# EAGLE board Small_G2iM+_kit (EAGLE 5.06)
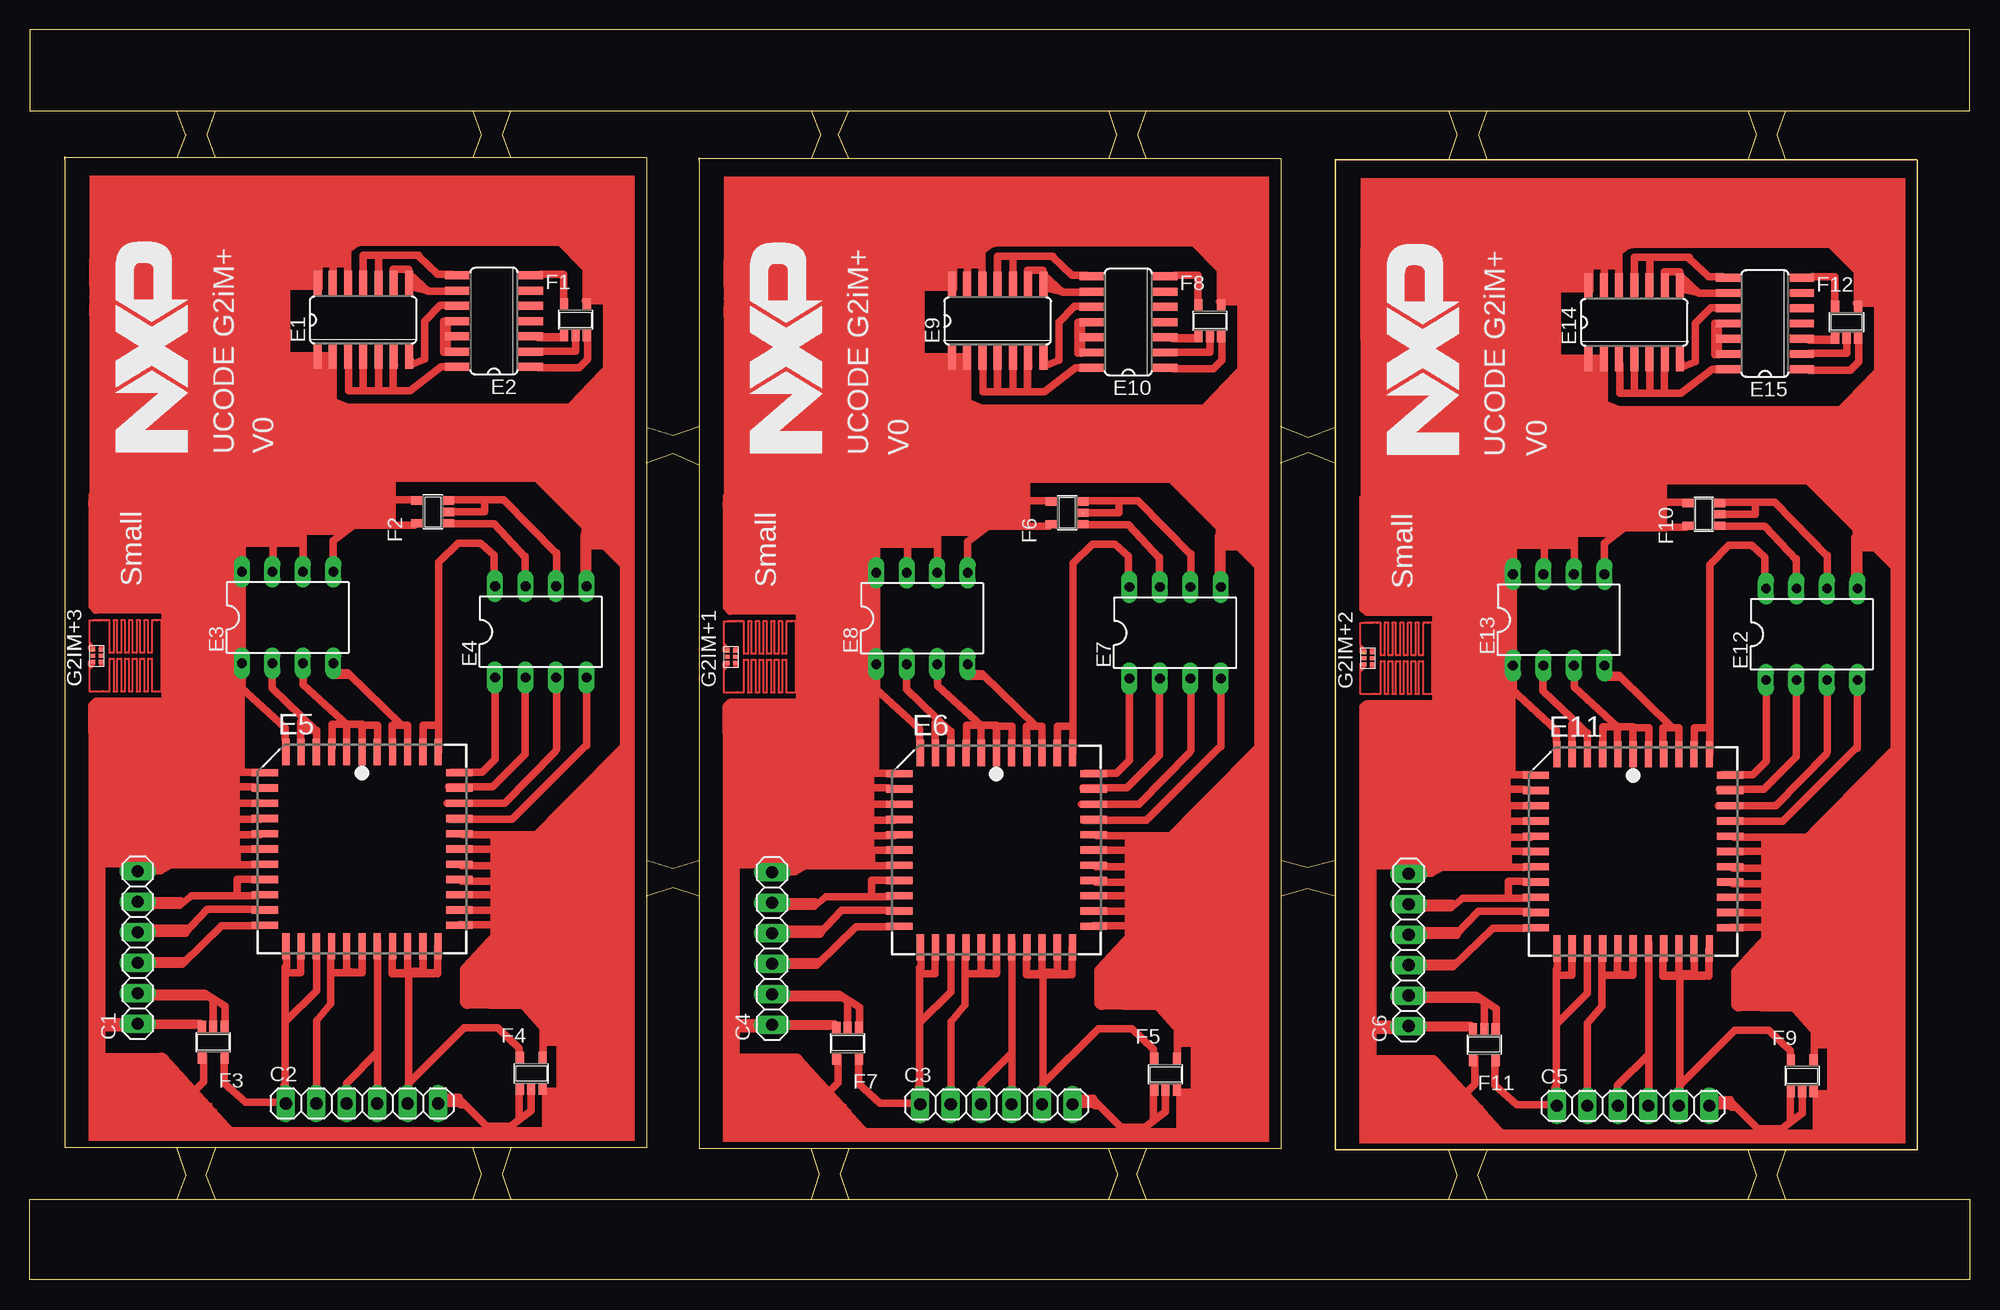
[diagram p0: board, top side]
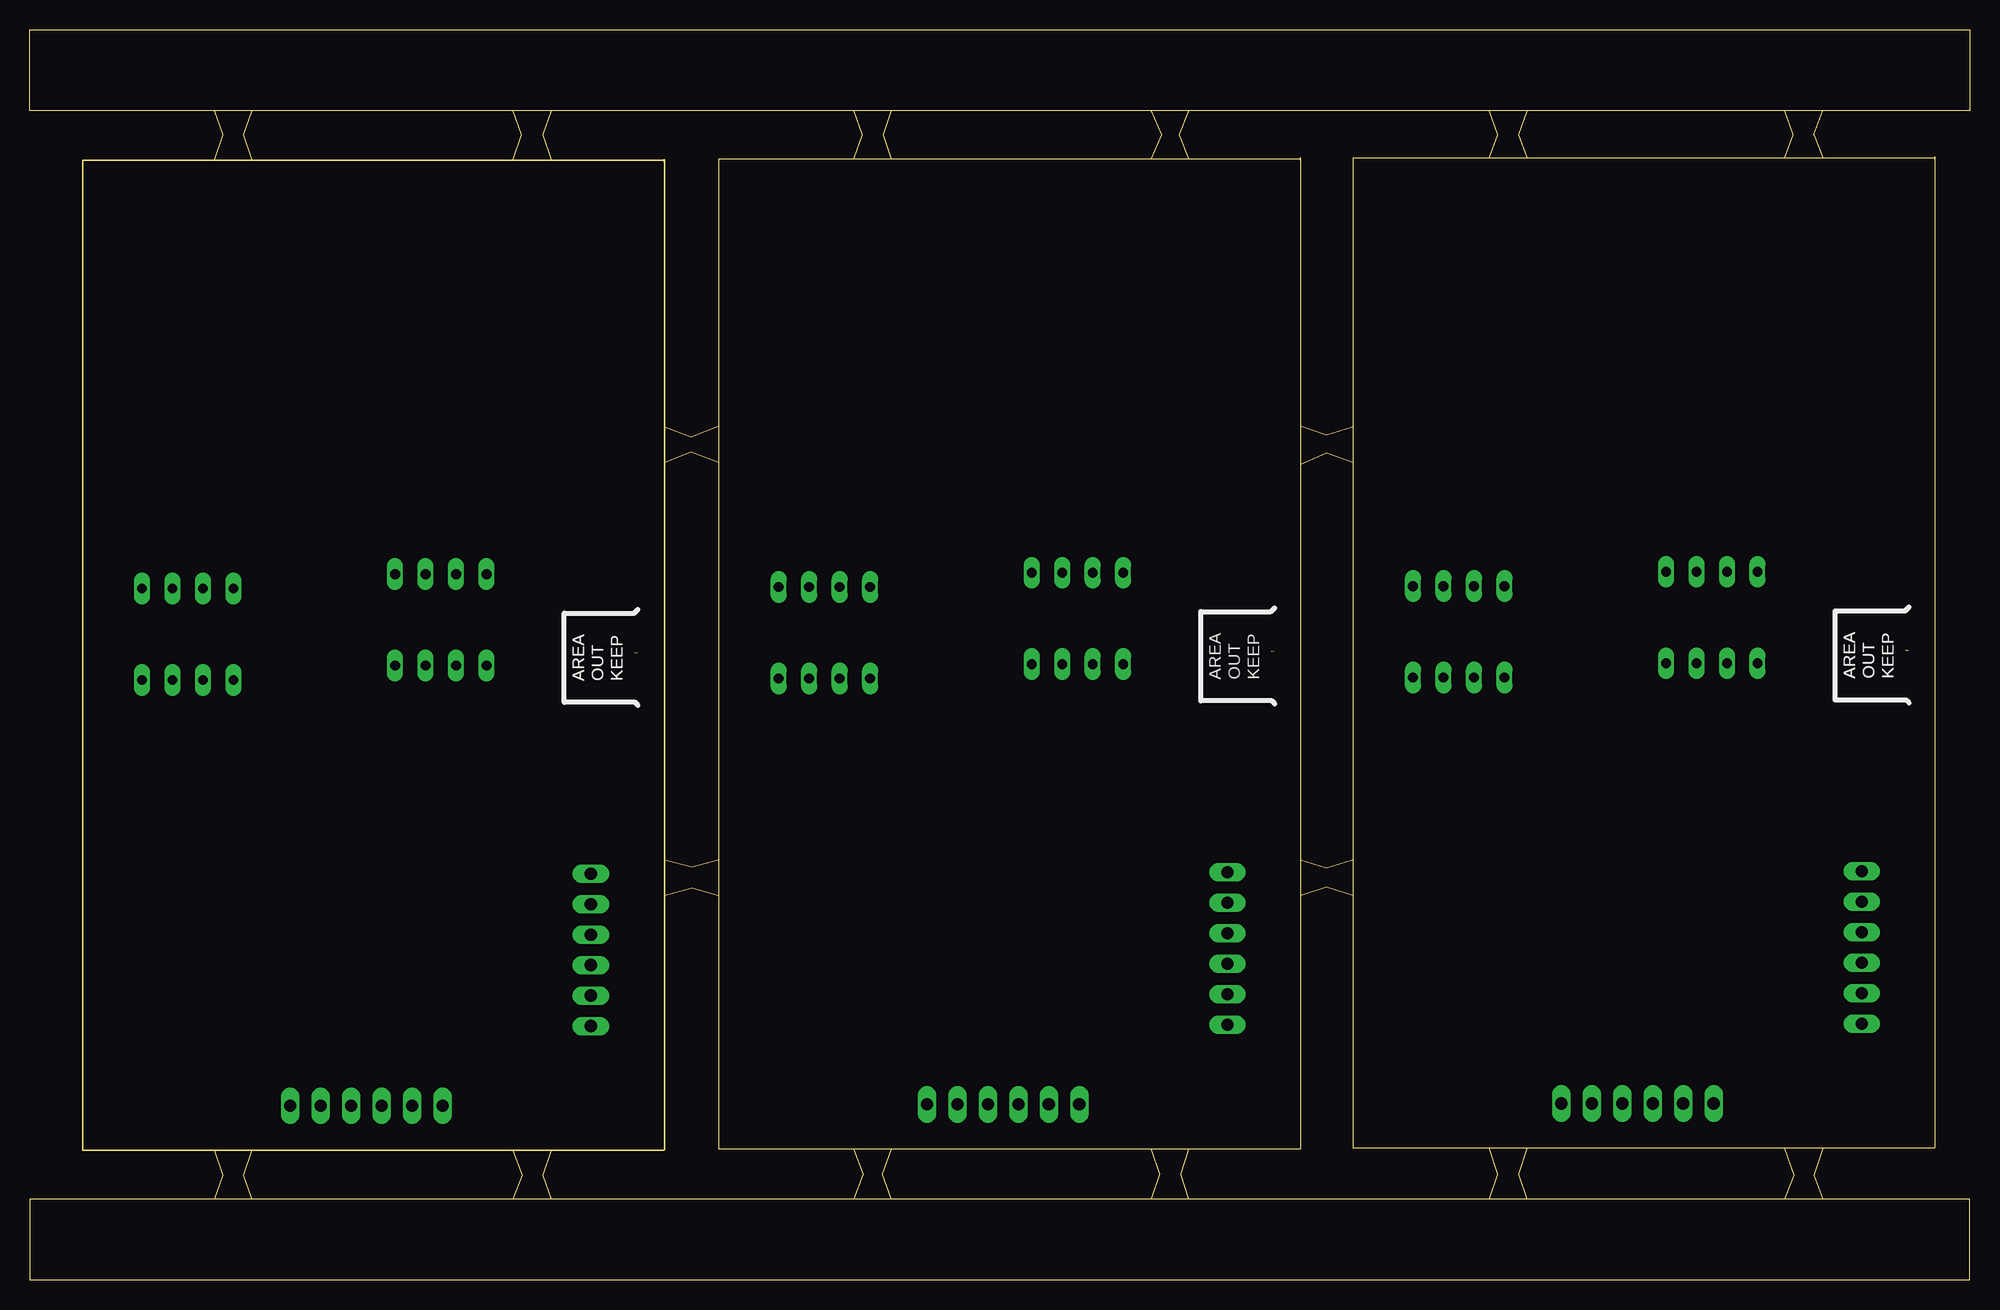
[diagram p1: board, bottom side, seen from below]

Size 161.68 x 104.16 mm. Coordinates in mm from the lower left corner, seen from the top.
Outline: 55.76,93.42 55.76,71.12
Outline: 55.76,71.12 55.76,67.92
Outline: 55.76,67.92 55.76,34.96
Outline: 55.76,34.96 55.76,32
Outline: 55.76,32 55.76,10.92
Outline: 108.8,71.04 108.8,93.34 157.3,93.34 157.3,10.84 108.8,10.84 108.8,32
Outline: 108.8,71.04 108.8,68.08
Outline: 108.8,68.08 108.8,34.96
Outline: 108.8,34.96 108.8,32
Outline: 12.24,97.44 0,97.44 0,104.16 161.68,104.16 161.68,97.44 146.32,97.44
Outline: 12.24,97.44 15.44,97.44
Outline: 15.44,97.44 36.88,97.44
Outline: 36.88,97.44 40.08,97.44
Outline: 40.08,97.44 65.12,97.44
Outline: 65.12,97.44 68.24,97.44
Outline: 68.24,97.44 89.92,97.44
Outline: 89.92,97.44 93.04,97.44
Outline: 93.04,97.44 118.24,97.44
Outline: 118.24,97.44 121.44,97.44
Outline: 121.44,97.44 143.2,97.44
Outline: 143.2,97.44 146.32,97.44
Outline: 12.24,6.72 0,6.72 0,0 161.68,0 161.68,6.72 146.32,6.72
Outline: 12.24,6.72 15.44,6.72
Outline: 15.44,6.72 36.88,6.72
Outline: 36.88,6.72 40.08,6.72
Outline: 40.08,6.72 65.12,6.72
Outline: 65.12,6.72 68.24,6.72
Outline: 68.24,6.72 89.92,6.72
Outline: 89.92,6.72 93.04,6.72
Outline: 93.04,6.72 118.24,6.72
Outline: 118.24,6.72 121.44,6.72
Outline: 121.44,6.72 143.2,6.72
Outline: 143.2,6.72 146.32,6.72
Outline: 12.24,93.52 12.96,95.44 12.24,97.44
Outline: 15.44,97.44 14.72,95.44 15.44,93.52
Outline: 40.08,97.44 39.36,95.44 40.08,93.52
Outline: 36.88,97.44 37.6,95.44 36.88,93.52
Outline: 51.44,71.04 53.6,70.4 55.76,71.12
Outline: 104.24,71.12 106.56,70.24 108.8,71.04
Outline: 51.36,68.08 53.6,68.88 55.76,67.92
Outline: 104.24,68.08 106.56,68.96 108.8,68.08
Outline: 51.44,34.96 53.6,34.32 55.76,34.96
Outline: 104.32,34.96 106.48,34.4 108.8,34.96
Outline: 51.36,32 53.6,32.72 55.76,32
Outline: 104.32,32 106.48,32.64 108.8,32
Outline: 12.24,10.96 12.96,8.72 12.24,6.72
Outline: 15.44,10.96 14.64,8.72 15.44,6.72
Outline: 36.88,10.96 37.6,8.8 36.88,6.72
Outline: 40.08,10.96 39.36,8.8 40.08,6.72
Outline: 65.12,97.44 65.92,95.44 65.12,93.44
Outline: 65.12,10.88 65.76,8.8 65.12,6.72
Outline: 68.24,97.44 67.36,95.44 68.24,93.44
Outline: 68.24,10.88 67.52,8.8 68.24,6.72
Outline: 93.04,97.44 92.32,95.44 93.04,93.44
Outline: 89.92,97.44 90.56,95.44 89.92,93.44
Outline: 89.92,10.88 90.64,8.8 89.92,6.72
Outline: 93.04,10.88 92.24,8.8 93.04,6.72
Outline: 118.24,97.44 118.96,95.44 118.24,93.36
Outline: 121.44,97.44 120.72,95.44 121.44,93.36
Outline: 118.24,10.8 118.96,8.72 118.24,6.72
Outline: 121.44,10.8 120.64,8.72 121.44,6.72
Outline: 146.32,97.44 145.6,95.44 146.32,93.36
Outline: 143.2,97.44 143.92,95.44 143.2,93.36
Outline: 143.2,10.8 143.92,8.72 143.2,6.72
Outline: 146.32,10.8 145.6,8.72 146.32,6.72
Outline: 55.76,10.92 104.26,10.92 104.26,93.42 55.76,93.42
Outline: 55.76,93.42 55.76,10.92
Outline: 51.38,11 2.88,11 2.88,93.5 51.38,93.5 51.38,11
Outline: 157.33,10.8 108.83,10.8 108.83,93.3 157.33,93.3 157.33,10.8
Copper layers (1*16): Top 0.035mm / dielectric 1.5mm / Bottom 0.035mm
Design rules "default *": minimum track width 10mil, minimum drill 24mil, track to track 0mil, track to pad 0mil, pad to pad 0mil, via to via 8mil, smd to smd 0mil, copper to edge 40mil, drill to drill 8mil, minimum pad ring 10mil, minimum via ring 8mil, stop-mask expansion 0mil, vias tented up to drill 0mil, thermal gap 10mil

## Footprints (pad centres in the part's own frame; a part is rotated, then mirrored left to right if it is on the bottom)
1X06 = drill 1.016 long: 1 -6.35,0; 2 -3.81,0; 3 -1.27,0; 4 1.27,0; 5 3.81,0; 6 6.35,0
SO14 = smd 0.66 x 2.032: 1 -3.81,-3.073; 2 -2.54,-3.073; 3 -1.27,-3.073; 4 0,-3.073; 5 1.27,-3.073; 6 2.54,-3.073; 7 3.81,-3.073; 8 3.81,3.073; 9 2.54,3.073; 10 1.27,3.073; 11 0,3.073; 12 -1.27,3.073; 13 -2.54,3.073; 14 -3.81,3.073
DIL08 = drill 0.813 long: 1 -3.81,-3.81; 2 -1.27,-3.81; 3 1.27,-3.81; 4 3.81,-3.81; 5 3.81,3.81; 6 1.27,3.81; 7 -1.27,3.81; 8 -3.81,3.81
PLCC44 = smd 0.6 x 2.2: 1 0,8.1; 2 -1.27,8.1; 3 -2.54,8.1; 4 -3.81,8.1; 5 -5.08,8.1; 6 -6.35,8.1; 18 -6.35,-8.1; 19 -5.08,-8.1; 20 -3.81,-8.1; 21 -2.54,-8.1; 22 -1.27,-8.1; 23 0,-8.1; 24 1.27,-8.1; 25 2.54,-8.1; 26 3.81,-8.1; 27 5.08,-8.1; 28 6.35,-8.1; 40 6.35,8.1; 41 5.08,8.1; 42 3.81,8.1; 43 2.54,8.1; 44 1.27,8.1 | smd 2.2 x 0.6: 7 -8.1,6.35; 8 -8.1,5.08; 9 -8.1,3.81; 10 -8.1,2.54; 11 -8.1,1.27; 12 -8.1,0; 13 -8.1,-1.27; 14 -8.1,-2.54; 15 -8.1,-3.81; 16 -8.1,-5.08; 17 -8.1,-6.35; 29 8.1,-6.35; 30 8.1,-5.08; 31 8.1,-3.81; 32 8.1,-2.54; 33 8.1,-1.27; 34 8.1,0; 35 8.1,1.27; 36 8.1,2.54; 37 8.1,3.81; 38 8.1,5.08; 39 8.1,6.35
SOT23-5 = smd 0.69 x 0.99: 1 -0.95,-1.29; 2 0,-1.29; 3 0.95,-1.29; 4 0.95,1.3; 5 -0.95,1.3
SOT886 = smd 0.35 x 0.4: 1 0.5,0.338; 2 0,0.338; 3 -0.5,0.338; 4 -0.5,-0.338; 5 0,-0.338; 6 0.5,-0.338

## Placement (x,y rotation side)
C1  [1X06]  8.98,27.7 90 top
C2  [1X06]  27.68,14.7 0 top
C3  [1X06]  80.56,14.62 0 top
C4  [1X06]  61.86,27.62 90 top
C5  [1X06]  133.63,14.5 0 top
C6  [1X06]  114.93,27.5 90 top
E1  [SO14]  27.78,80 0 top
E2  [SO14]  38.68,79.9 90 top
E3  [DIL08]  21.48,55.2 0 top
E4  [DIL08]  42.58,54 0 top
E5  [PLCC44]  27.68,35.9 0 top
E6  [PLCC44]  80.56,35.82 0 top
E7  [DIL08]  95.46,53.92 0 top
E8  [DIL08]  74.36,55.12 0 top
E9  [SO14]  80.66,79.92 0 top
E10  [SO14]  91.56,79.82 90 top
E11  [PLCC44]  133.63,35.7 0 top
E12  [DIL08]  148.53,53.8 0 top
E13  [DIL08]  127.43,55 0 top
E14  [SO14]  133.73,79.8 0 top
E15  [SO14]  144.63,79.7 90 top
E$1  [LOGO]  66.04,68.88 90 top
E$2  [LOGO]  13.16,68.96 90 top
E$3  [LOGO]  119.11,68.76 90 top
F1  [SOT23-5]  45.48,80 0 top
F2  [SOT23-5]  33.58,64 90 top
F3  [SOT23-5]  15.28,19.8 180 top
F4  [SOT23-5]  41.78,17.2 0 top
F5  [SOT23-5]  94.66,17.12 0 top
F6  [SOT23-5]  86.46,63.92 90 top
F7  [SOT23-5]  68.16,19.72 180 top
F8  [SOT23-5]  98.36,79.92 0 top
F9  [SOT23-5]  147.73,17 0 top
F10  [SOT23-5]  139.53,63.8 90 top
F11  [SOT23-5]  121.23,19.6 180 top
F12  [SOT23-5]  151.43,79.8 0 top
G2IM+  [SOT886]  5.58,52 90 top
G2IM+1  [SOT886]  58.46,51.92 90 top
G2IM+2  [SOT886]  111.54,51.8 90 top
G2IM+3  [SOT886]  5.58,52 90 top

## Library data of the parts
C1-C6 = pinhead
E1 E2 E9 E10 E14 E15 = 74xx-eu
E3 E4 E7 E8 E12 E13 = ic-package
E5 E6 E11 = altera
E$1-E$3 G2IM+ G2IM+1-G2IM+3 = NXP_1
F1-F12 = 74xx-little-us

## Tracks (layer width: path | path; a pad name or v marks a point on that pad's centre or on a via)
S$1
  Top 0.254: 6.28,78.7 6.28,79
S$2
  Top 0.254: 5.08,83 5.08,85.1 | 5.78,82.9 5.38,83.3 | 7.18,82.9 7.48,83.2 7.78,83.2 7.78,83 7.78,83.3 7.48,83.3
  Top 0.305: 7.18,82.9 6.78,82.9 | 7.18,82.9 7.28,82.9 | 6.78,82.9 5.78,82.9 5.08,82.9 5.08,83 5.18,83 5.18,83.4 | 7.18,82.9 6.78,82.9 | 7.18,82.9 7.78,82.9 | 7.48,83.2 7.48,83
S$3
  Top 0.254: 5.48,81.9 6.78,81.9 | 5.08,81.9 5.08,78.3 | 6.58,78.8 5.18,80.2 5.08,80.3 5.08,81.2
  Top 0.305: 7.08,81.9 7.28,81.9 | 5.48,81.9 7.08,81.9 | 5.48,81.9 5.08,81.9 5.18,81.9 5.18,81.5 | 5.18,80.2 5.18,81.5 | 7.08,81.9 7.48,81.9 7.78,81.9 | 5.18,81.5 5.48,81.9
S$4
  Top 0.305: 5.58,82.9 5.18,83.1
S$5
  Top 0.406: 16.98,12.3 14.78,14.7
S$6
  Top 0.406: 5.38,81.7 5.38,81.5 | 5.38,81.5 5.38,79.8 | 5.38,81.5 5.68,81.8
S$7
  Top 0.254: 8.38,82.9 8.78,82.9 8.78,83.3 8.38,83.3 8.38,83 8.68,83 8.68,83.1 8.58,83.1
  Top 0.305: 8.38,82.9 8.58,82.9
S$8
  Top 1.422: 21.88,83.8 12.18,74.3 16.28,76.9 17.08,74.9
S$9
  Top 0.254: 7.48,81.8 7.48,81.4 7.78,81.4 7.78,81.8 7.68,81.8 7.68,81.5
S$10
  Top 0.254: 5.08,65.7 5.38,65.7 5.38,65.3 5.18,65.3 5.18,65.6
S$11
  Top 0.254: 7.48,81.6 7.18,81.9
S$12
  Top 0.305: 8.38,81.8 8.58,81.8
S$13
  Top 1.422: 12.28,73.7 12.18,73.7
S$14
  Top 1.422: 8.28,63.8 13.98,70.2
S$15
  Top 0.254: 8.38,81.9 8.38,81.4 8.78,81.4 8.78,81.9 8.48,81.9 8.48,81.5 8.68,81.5 8.68,81.7
S$16
  Top 0.813: 11.04,55.92 5.52,55.92
S$17
  Top 0.3: 5.28,52.5 4.98,52.5 4.98,52.8
S$18
  Top 0.3: 5.28,51.5 4.98,51.5 4.98,51.2
S$19
  Top 0.16: 6.08,51.6 6.08,51.2 5.84,51.2 5.84,51.44 5.92,51.36 5.92,51.28 6,51.2
S$20
  Top 1.422: 17.78,79.4 17.88,79.4 17.88,74.1 16.88,74.1 16.88,78.2 16.28,78.2 16.28,74.3 15.18,74.3 15.18,75.4 14.28,75.4 14.28,74.3
S$21
  Top 0.254: 5.08,66.4 5.08,66.3 | 5.08,66.4 5.08,65.8 5.78,65.5 5.08,66.4
S$22
  Top 0.254: 15.28,79.4 15.38,79.4 15.38,79
S$23
  Top 0.254: 5.28,79.9 5.28,78.9 6.08,78.9 6.08,79 5.98,79 5.98,79.2 5.48,79.2 5.48,79.7 5.68,79.7 5.68,79.4 5.78,79.4 5.78,79 5.48,79
S$24
  Top 0.254: 5.28,66 5.08,66 | 5.28,66 5.18,66.2 | 5.28,66 5.58,65.6 5.28,65.9 | 5.28,66 5.38,66 5.28,65.9 | 5.28,65.9 5.28,66 | 5.28,65.9 5.08,66.1
S$25
  Top 0.61: 20.78,86.6 20.98,86.6 20.98,83.4 18.68,83.4 18.68,80.9 18.28,80.9 18.28,82 17.98,82 17.98,80.8 17.58,80.8 17.58,81.3 17.28,81.3 17.28,79.9 16.88,79.9 16.88,80.7 16.48,80.7 16.48,78.9 16.18,78.9 | 15.28,78.9 16.18,78.9 | 16.18,78.9 16.18,79.7 15.68,79.7 15.68,79.2
S$26
  Top 1.422: 12.88,68.5 12.88,63.9 11.78,63.9 11.78,67.3 11.18,66.6 11.08,63.7 10.28,63.7 10.28,63.5 10.38,63.5 10.38,64.7 9.78,64.7 9.78,63.4
S$27
  Top 1.422: 9.38,64.5 5.58,64.5 5.58,64.9 9.88,64.9 9.88,65
S$28
  Top 0.254: 5.18,83.2 5.18,83.4 6.28,84.3
  Top 0.305: 5.18,83.4 5.18,83
S$29
  Top 0.254: 5.18,68 5.78,68 5.78,68.2 5.38,68.2 5.38,68.6 5.58,68.6 5.58,68.3
S$30
  Top 0.254: 5.28,84.2 5.28,84 | 5.28,83.5 5.28,84 | 5.28,84 5.58,84 | 5.58,84 5.88,84 5.88,84.1 5.48,83.9 5.48,83.8 5.58,84 | 5.58,84 5.58,83.9
S$31
  Top 0.254: 5.38,84.4 5.48,84.4 5.48,84.1 5.98,84.1 5.98,84.2 6.08,84.2 6.08,84.3 5.58,84.3 5.58,84.2
S$32
  Top 0.254: 16.18,80.2 16.18,79.9
S$33
  Top 0.3: 5.28,52.5 4.98,52.5 4.98,52.8
S$34
  Top 1.27: 13.18,71.7 13.78,71.7 13.78,72.1 7.98,66.2
S$35
  Top 0.254: 11.38,69.2 11.38,68.4
S$36
  Top 0.16: 5.04,52.72 5.12,52.64 5.2,52.64 5.2,52.72
S$37
  Top 0.16: 5.28,51.44 4.96,51.04
S$38
  Top 0.813: 5.28,58.08 5.28,56.16
S$39
  Top 0.61: 38.78,43.4 38.78,50.1
S$40
  Top 0.61: 34.88,41.1 38.58,41.1 41.28,43.8 41.28,50.1 41.38,50.1
S$41
  Top 0.61: 46.48,58.4 46.48,63.4 | 46.48,63.4 46.48,63.6 | 46.48,63.4 46.48,68.9
S$42
  Top 0.61: 46.18,62.1 46.18,58.1
S$43
  Top 0.61: 34.78,39.7 39.48,39.7
S$44
  Top 0.61: 39.58,39.7 43.78,44
S$45
  Top 0.61: 43.88,49.9 43.88,44.2
S$46
  Top 0.61: 38.68,43.3 37.68,42.3 35.08,42.3
S$47
  Top 0.61: 34.98,38.4 40.18,38.4 46.18,44.4
S$48
  Top 0.61: 46.38,49.9 46.38,44.5
S$49
  Top 0.61: 42.78,18.5 42.78,24.6
S$50
  Top 0.61: 42.78,15.7 47.98,15.7 47.98,15.8
S$51
  Top 0.61: 36.08,37.1 48.68,37.1 48.98,37.1 | 49.48,37.1 48.98,37.1 | 48.98,37.1 48.98,35.5
  Top 1.27: 48.68,37.1 48.88,37.1 48.88,42.4 48.18,42.4 48.18,37 47.68,37 47.68,40.7 46.88,40.7 46.88,37.3 45.98,37.3 45.98,39.5 45.48,39.5 45.48,37.3 44.48,37.3 44.48,38
S$52
  Top 0.61: 35.58,35.9 49.18,35.9
S$53
  Top 0.61: 35.78,29.6 43.68,29.6 43.68,29.5
S$54
  Top 0.61: 35.88,30.8 41.68,30.8 44.18,30.8
  Top 1.27: 36.48,25.8 42.78,32.6 42.78,25.3 41.68,25.3 41.68,30.8
S$55
  Top 0.61: 35.68,32.1 43.88,32.1 43.88,31.9
S$56
  Top 0.61: 35.98,33.2 43.48,33.2 43.48,33.1
S$57
  Top 0.61: 35.98,34.5 43.48,34.5 43.48,34.4
S$58
  Top 0.61: 41.78,15.8 41.78,14.1 40.08,12.8
S$59
  Top 0.61: 39.98,12.8 38.08,12.8 35.78,15.1
S$60
  Top 0.61: 40.78,15.6 40.78,13.6
S$61
  Top 0.61: 31.48,15 31.48,16.1 31.58,16.1 31.58,25.7 | 31.48,27 31.48,25.7 31.58,25.7 | 31.58,25.7 32.78,25.7 32.78,27
S$62
  Top 0.61: 31.58,16.4 36.18,21
S$63
  Top 0.61: 40.78,18.5 40.78,19.2
S$64
  Top 0.61: 40.78,19.3 38.98,21 36.18,21
S$65
  Top 0.61: 28.88,15 28.98,15 28.98,28.3
S$66
  Top 0.61: 23.78,14.9 23.88,14.9 23.88,21.5
S$67
  Top 0.61: 26.38,26.9 26.38,25.6 25.08,25.6 25.08,25.7 | 25.08,25.7 25.08,27.1 | 25.08,25.7 25.08,23 23.88,21.6
S$68
  Top 0.61: 34.98,65 37.88,65 | 37.88,65 39.48,65 43.88,60.5 | 34.88,64 37.88,64 37.88,65
S$69
  Top 0.61: 43.88,60.6 43.88,58.8
S$70
  Top 0.61: 34.88,63 38.68,63 41.28,60.2
S$71
  Top 0.61: 41.18,60.3 41.28,60.3 41.28,58.5
S$72
  Top 0.61: 26.38,15 26.38,16.4 28.98,19 28.98,17.7
S$73
  Top 1.016: 40.68,23.6 43.68,20.2 45.98,19.7
S$74
  Top 0.61: 28.98,44.8 28.98,46.2 27.48,46.2 27.48,46.3 | 27.68,44.8 27.68,46.3 27.48,46.3 | 27.48,46.3 26.38,46.3 | 26.38,46.3 25.18,46.3 25.18,44.3 | 26.38,44.5 26.38,46.3
S$75
  Top 0.61: 21.38,27 21.38,26.1 21.28,26.1 21.28,14.8
S$76
  Top 0.61: 22.48,25.6 21.38,25.6
S$77
  Top 1.27: 40.38,26.7 37.78,26.7 37.78,26.5
S$78
  Top 0.61: 32.28,65 29.88,65 27.68,66.6
S$79
  Top 0.61: 27.58,66.7 27.58,69.9
S$80
  Top 0.61: 22.58,27 22.58,25.6
S$81
  Top 0.61: 30.28,26.9 30.18,26.9 30.18,25.5
S$82
  Top 0.61: 30.18,25.7 30.18,25.6 33.98,25.5 33.98,27.8
S$83
  Top 0.61: 10.18,62.5 14.28,62.5
S$84
  Top 0.61: 18.98,42.3 17.18,42.3 | 17.18,42.3 16.78,42.3 | 16.78,42.3 15.08,42.3 15.08,42.2 | 18.68,41.1 17.18,41.1 17.18,40.9 | 17.18,40.9 17.18,39.7 18.98,39.7 18.98,39.8 | 17.18,42.3 17.18,40.9 | 16.78,42.3 16.78,39.7 16.38,39.7 | 15.88,39.7 16.38,39.7 | 16.38,39.7 16.38,42.1
S$85
  Top 0.61: 32.78,44.9 32.78,46.2 34.08,46.2 | 34.08,44.9 34.08,46.2 | 34.08,46.2 34.08,59.8 | 34.08,46.2 34.08,44
S$86
  Top 0.61: 19.18,38.4 15.08,38.4 15.08,38.5
S$87
  Top 0.61: 19.18,37.1 15.38,37.1 15.38,37.2
S$88
  Top 0.61: 18.58,35.9 17.28,35.9 17.28,34.6 | 17.28,34.6 18.78,34.6 | 11.78,34.6 17.28,34.6
S$89
  Top 0.61: 9.98,34.1 10.88,34.1 11.78,34.6
S$90
  Top 0.61: 14.38,18.7 14.48,18.7 14.48,16.5 12.78,14.8 5.98,14.8 5.98,14.9
S$91
  Top 0.61: 16.18,18.3 16.18,16.4
S$92
  Top 0.61: 16.18,16.4 17.98,14.8
S$93
  Top 0.61: 21.38,14.8 17.98,14.8
S$94
  Top 0.61: 17.58,50.7 17.58,48 14.28,44.2
S$95
  Top 0.61: 8.18,21.3 6.08,21.3
S$96
  Top 0.61: 15.98,29.5 18.88,29.5
S$97
  Top 0.61: 10.28,26.3 12.68,26.3 15.98,29.5
S$98
  Top 0.61: 14.18,21.4 9.78,21.4
S$99
  Top 0.61: 16.28,21.4 16.28,22.8 14.58,23.9 9.88,23.9
S$100
  Top 0.61: 15.28,21.3 15.28,23.1
S$101
  Top 0.61: 18.88,30.9 14.78,30.9 12.88,28.9
S$102
  Top 0.61: 9.78,28.9 12.98,28.9
S$103
  Top 0.61: 17.28,32 13.48,32 12.48,31.2 9.88,31.2 9.88,31.3 | 17.28,32 18.78,32 | 18.68,33.4 17.28,33.4 17.28,32
S$104
  Top 0.61: 25.28,59.7 25.28,61.6 26.98,62.9 32.08,62.9 32.08,63.1
S$105
  Top 0.61: 20.28,59.9 20.28,61.4 | 22.78,60.8 22.78,61.4 20.28,61.4 | 22.78,60.8 22.78,60 | 20.28,61.4 17.68,61.4 17.68,60.9 | 17.68,60.9 17.68,59.7 | 20.28,61.4 20.28,63.9 | 17.58,62.8 17.68,62.8 17.68,60.9 | 22.78,62.8 22.78,60.8
S$106
  Top 0.61: 38.68,58.8 38.68,60.4 37.58,61.4 35.68,61.4 34.08,59.8
S$107
  Top 0.61: 30.88,46.3 26.58,50.5
S$108
  Top 0.61: 23.88,44.2 23.88,45.7 22.58,47 20.18,49.3
S$109
  Top 0.61: 17.58,49.4 21.28,46 21.28,45
S$110
  Top 0.61: 20.18,50.8 20.18,49.3
S$111
  Top 1.27: 41.58,36 49.68,44.2
S$112
  Top 0.61: 31.48,25.6 30.28,25.6
S$113
  Top 0.61: 33.78,25.6 31.58,25.6 31.58,25.5 | 31.58,25.5 30.38,25.5 | 31.58,25.5 33.68,25.5
S$114
  Top 0.61: 22.78,50.8 22.78,49.6 26.38,46.3
S$115
  Top 0.61: 31.48,44.5 31.48,46.2 30.18,46.2 30.18,44.5
S$116
  Top 1.27: 38.68,23.2 36.48,23.2 36.48,25.8 38.58,25.8 38.58,25.6 38.28,25.6 38.28,23.8 37.58,23.8 37.58,24.8
S$117
  Top 0.16: 5.84,52.56 5.84,52.8 6.08,52.8 6.08,52.4 5.92,52.56 5.92,52.72
S$118
  Top 1.27: 49.48,60 39.78,69.7 39.78,69.6 39.98,69.6
S$119
  Top 1.27: 45.38,69.5 45.78,69.5 45.78,65 44.98,65 44.98,66.1 44.88,66.1 44.88,68.8 42.68,68.8 42.68,68.4 44.08,68.4 44.08,67.4 44.18,67.4 44.18,66.8 43.48,66.8 43.48,67.5
S$120
  Top 1.27: 42.58,69.5 42.48,69.5 42.48,67.4 42.18,67.4 42.18,68.9
S$121
  Top 1.27: 15.88,62.9 15.68,62.9
S$122
  Top 1.27: 14.58,14 9.78,14 9.78,14.1 14.98,13.9 10.98,18.3
S$123
  Top 1.27: 11.88,15.7 12.88,15.7 12.88,14.1
S$124
  Top 0.61: 26.68,50.4 25.18,50.4
S$125
  Top 0.61: 25.18,50.6 26.48,50.6
S$126
  Top 0.61: 23.88,45.8 22.58,45.8 | 22.58,45.8 22.58,44.8 | 22.58,45.8 22.58,46.5 22.88,46.5 22.88,46.2
S$127
  Top 0.61: 12.58,31.6 9.98,31.6
S$128
  Top 0.61: 13.08,29.3 9.78,29.3
S$129
  Top 0.61: 9.78,23.6 14.98,23.6 14.98,23.5
S$130
  Top 0.61: 9.98,26.6 12.88,26.6
S$131
  Top 0.61: 9.78,21.2 13.78,21.2
S$132
  Top 0.61: 6.08,21 8.18,21 8.18,21.5 6.38,21.5
S$133
  Top 0.61: 20.98,15.1 21.18,15.1 21.18,16.2
S$134
  Top 0.61: 22.58,61.8 18.08,61.8
S$135
  Top 0.61: 22.48,62.3 17.98,62.3
S$136
  Top 0.61: 17.98,62.4 14.38,62.4 14.38,62.3
S$137
  Top 0.61: 22.68,62.4 25.98,62.4 25.98,62.3
S$138
  Top 1.016: 46.88,22.4 42.48,22.4 42.48,22.5
S$139
  Top 1.016: 20.18,85 20.18,87 21.48,87 18.88,83.5 12.08,76.7 12.08,77.8 18.88,77.8
S$140
  Top 1.016: 19.48,84.1 19.58,84.1 19.58,82.6 20.28,82.6 20.28,84.2
S$141
  Top 0.61: 25.28,84 25.28,84.7 26.48,84.7 26.48,83.8
S$142
  Top 0.61: 35.18,83.8 33.98,83.8 32.38,85.3
S$143
  Top 0.61: 32.38,85.4 27.78,85.4 27.78,83.8
S$144
  Top 0.61: 29.08,85.3 29.08,83.3
S$145
  Top 0.61: 35.28,82.4 33.38,82.4 | 33.38,82.4 33.18,82.4 31.58,83.9 31.58,82.8 33.38,82.4
S$146
  Top 0.61: 31.98,83.3 32.08,83.3 32.08,82.9
S$147
  Top 0.61: 31.58,84 31.58,84.2 30.28,84.2 30.28,83.9
S$148
  Top 0.61: 44.58,81.6 44.48,81.6 44.48,83.8 42.58,83.8 42.58,83.7
S$149
  Top 0.61: 46.28,81.6 47.88,81.6
S$150
  Top 0.61: 44.58,78.5 42.38,78.5 42.38,78.6 44.28,78.6
S$151
  Top 0.61: 42.38,77.4 45.48,77.4 45.48,78.8
S$152
  Top 0.61: 42.38,76 45.78,76 46.48,76.7 46.48,78.6
S$153
  Top 0.61: 35.18,81.2 34.18,81.2 32.88,79.9 32.88,76.9
S$154
  Top 0.61: 32.88,76.7 31.68,76.2 31.68,76.7
S$155
  Top 0.61: 34.78,79.9 34.78,77.3
S$156
  Top 0.61: 34.48,79.9 34.48,77.3
S$157
  Top 0.61: 34.98,76.1 34.28,76.1 31.68,74.1 30.28,74.1 | 30.28,74.1 26.58,74.1 26.58,76.5 | 30.38,76.2 30.28,76.2 30.28,74.1
S$158
  Top 0.61: 27.78,76.3 27.78,74.4
S$159
  Top 0.61: 29.08,76.2 29.08,74.2
S$160
  Top 1.016: 44.48,71.9 46.98,74.5 48.98,76.6
S$161
  Top 1.016: 47.68,72.4 47.68,74.3 47.18,74.3 47.18,72.4 46.58,72.4 46.58,73
S$162
  Top 1.016: 48.28,78.2 48.28,82.6 42.38,88.6
S$163
  Top 1.016: 45.88,86.7 45.88,85.6
S$164
  Top 1.016: 25.78,85.5 25.68,85.5 27.18,86.6 29.18,87
S$165
  Top 1.016: 23.98,74.5 24.08,74.5 24.08,71.4 22.88,71.4 22.88,74 29.28,71.4
S$166
  Top 0.61: 27.68,25.6 27.68,27.2 | 27.68,25.6 26.38,25.7 | 26.48,25.6 27.68,25.6
S$167
  Top 0.61: 23.88,25.3 23.88,26.9 | 23.88,25.3 23.88,24.8 | 23.88,24.2 23.88,25.3
S$168
  Top 0.61: 23.88,24.1 21.28,21.5 21.28,24.1
S$169
  Top 0.61: 35.78,15.2 33.98,15.2 33.98,14.7 35.58,14.7 35.58,14.8 35.88,14.8 35.88,14.6 36.08,14.6
S$170
  Top 0.813: 11.28,48.08 11.2,48.08 5.44,48.08
S$171
  Top 0.813: 5.28,45.6 5.28,47.92
S$172
  Top 0.254: 57.96,66.32 57.96,66.22 | 57.96,66.32 57.96,65.72 58.66,65.42 57.96,66.32
S$173
  Top 0.254: 57.96,65.62 58.26,65.62 58.26,65.22 58.06,65.22 58.06,65.52
S$174
  Top 1.422: 65.16,73.62 65.06,73.62
S$175
  Top 1.422: 61.16,63.72 66.86,70.12
S$176
  Top 1.422: 74.76,83.72 65.06,74.22 69.16,76.82 69.96,74.82
S$177
  Top 1.422: 70.66,79.32 70.76,79.32 70.76,74.02 69.76,74.02 69.76,78.12 69.16,78.12 69.16,74.22 68.06,74.22 68.06,75.32 67.16,75.32 67.16,74.22
S$178
  Top 1.422: 65.76,68.42 65.76,63.82 64.66,63.82 64.66,67.22 64.06,66.52 63.96,63.62 63.16,63.62 63.16,63.42 63.26,63.42 63.26,64.62 62.66,64.62 62.66,63.32
S$179
  Top 1.422: 62.26,64.42 58.46,64.42 58.46,64.82 62.76,64.82 62.76,64.92
S$180
  Top 0.254: 57.96,82.92 57.96,85.02 | 58.66,82.82 58.26,83.22 | 60.06,82.82 60.36,83.12 60.66,83.12 60.66,82.92 60.66,83.22 60.36,83.22
  Top 0.305: 60.06,82.82 59.66,82.82 | 60.06,82.82 60.16,82.82 | 59.66,82.82 58.66,82.82 57.96,82.82 57.96,82.92 58.06,82.92 58.06,83.32 | 60.06,82.82 59.66,82.82 | 60.06,82.82 60.66,82.82 | 60.36,83.12 60.36,82.92
S$181
  Top 0.254: 58.16,65.92 57.96,65.92 | 58.16,65.92 58.06,66.12 | 58.16,65.92 58.46,65.52 58.16,65.82 | 58.16,65.92 58.26,65.92 58.16,65.82 | 58.16,65.82 58.16,65.92 | 58.16,65.82 57.96,66.02
S$182
  Top 0.254: 58.06,67.92 58.66,67.92 58.66,68.12 58.26,68.12 58.26,68.52 58.46,68.52 58.46,68.22
S$183
  Top 1.27: 66.06,71.62 66.66,71.62 66.66,72.02 60.86,66.12
S$184
  Top 0.254: 64.26,69.12 64.26,68.32
S$185
  Top 0.61: 87.76,41.02 91.46,41.02 94.16,43.72 94.16,50.02 94.26,50.02
S$186
  Top 0.61: 99.36,58.32 99.36,63.32 | 99.36,63.32 99.36,63.52 | 99.36,63.32 99.36,68.82
S$187
  Top 0.61: 99.06,62.02 99.06,58.02
S$188
  Top 0.61: 87.66,39.62 92.36,39.62
S$189
  Top 0.61: 92.46,39.62 96.66,43.92
S$190
  Top 0.61: 96.76,49.82 96.76,44.12
S$191
  Top 0.61: 91.66,43.32 91.66,50.02
S$192
  Top 0.61: 91.56,43.22 90.56,42.22 87.96,42.22
S$193
  Top 0.61: 87.86,38.32 93.06,38.32 99.06,44.32
S$194
  Top 0.61: 99.26,49.82 99.26,44.42
S$195
  Top 0.61: 95.66,18.42 95.66,24.52
S$196
  Top 0.61: 95.66,15.62 100.86,15.62 100.86,15.72
S$197
  Top 0.61: 88.96,37.02 101.56,37.02 101.86,37.02 | 102.36,37.02 101.86,37.02 | 101.86,37.02 101.86,35.42
  Top 1.27: 101.56,37.02 101.76,37.02 101.76,42.32 101.06,42.32 101.06,36.92 100.56,36.92 100.56,40.62 99.76,40.62 99.76,37.22 98.86,37.22 98.86,39.42 98.36,39.42 98.36,37.22 97.36,37.22 97.36,37.92
S$198
  Top 0.61: 88.46,35.82 102.06,35.82
S$199
  Top 0.61: 88.66,29.52 96.56,29.52 96.56,29.42
S$200
  Top 0.61: 88.76,30.72 94.56,30.72 97.06,30.72
  Top 1.27: 89.36,25.72 95.66,32.52 95.66,25.22 94.56,25.22 94.56,30.72
S$201
  Top 0.61: 88.56,32.02 96.76,32.02 96.76,31.82
S$202
  Top 0.61: 88.86,33.12 96.36,33.12 96.36,33.02
S$203
  Top 0.61: 88.86,34.42 96.36,34.42 96.36,34.32
S$204
  Top 0.61: 94.66,15.72 94.66,14.02 92.96,12.72
S$205
  Top 0.61: 93.66,15.52 93.66,13.52
S$206
  Top 0.61: 84.36,14.92 84.36,16.02 84.46,16.02 84.46,25.62 | 84.36,26.92 84.36,25.62 84.46,25.62 | 84.46,25.62 85.66,25.62 85.66,26.92
S$207
  Top 0.61: 84.46,16.32 89.06,20.92
S$208
  Top 0.61: 93.66,18.42 93.66,19.12
S$209
  Top 0.61: 93.66,19.22 91.86,20.92 89.06,20.92
S$210
  Top 0.61: 81.76,14.92 81.86,14.92 81.86,28.22
S$211
  Top 0.61: 87.86,64.92 90.76,64.92 | 90.76,64.92 92.36,64.92 96.76,60.42 | 87.76,63.92 90.76,63.92 90.76,64.92
S$212
  Top 0.61: 96.76,60.52 96.76,58.72
S$213
  Top 0.61: 87.76,62.92 91.56,62.92 94.16,60.12
S$214
  Top 0.61: 94.06,60.22 94.16,60.22 94.16,58.42
S$215
  Top 0.61: 79.26,14.92 79.26,16.32 81.86,18.92 81.86,17.62
S$216
  Top 0.61: 79.26,26.82 79.26,25.52 77.96,25.52 77.96,25.62 | 77.96,25.62 77.96,27.02 | 77.96,25.62 77.96,22.92 76.76,21.52
S$217
  Top 0.61: 75.36,25.52 74.26,25.52
S$218
  Top 0.61: 85.16,64.92 82.76,64.92 80.56,66.52
S$219
  Top 0.61: 80.46,66.62 80.46,69.82
S$220
  Top 0.61: 75.46,26.92 75.46,25.52
S$221
  Top 0.61: 83.16,26.82 83.06,26.82 83.06,25.42
S$222
  Top 0.61: 83.06,25.62 83.06,25.52 86.86,25.42 86.86,27.72
S$223
  Top 0.61: 71.86,42.22 70.06,42.22 | 70.06,42.22 69.66,42.22 | 69.66,42.22 67.96,42.22 67.96,42.12 | 71.56,41.02 70.06,41.02 70.06,40.82 | 70.06,40.82 70.06,39.62 71.86,39.62 71.86,39.72 | 70.06,42.22 70.06,40.82 | 69.66,42.22 69.66,39.62 69.26,39.62 | 68.76,39.62 69.26,39.62 | 69.26,39.62 69.26,42.02
S$224
  Top 0.61: 72.06,38.32 67.96,38.32 67.96,38.42
S$225
  Top 0.61: 72.06,37.02 68.26,37.02 68.26,37.12
S$226
  Top 0.61: 71.46,35.82 70.16,35.82 70.16,34.52 | 70.16,34.52 71.66,34.52 | 64.66,34.52 70.16,34.52
S$227
  Top 0.61: 62.86,34.02 63.76,34.02 64.66,34.52
S$228
  Top 0.61: 69.06,18.22 69.06,16.32
S$229
  Top 0.61: 69.06,16.32 70.86,14.72
S$230
  Top 0.61: 74.26,14.72 70.86,14.72
S$231
  Top 0.61: 67.26,18.62 67.36,18.62 67.36,16.42 65.66,14.72 58.86,14.72 58.86,14.82
S$232
  Top 0.61: 70.46,50.62 70.46,47.92 67.16,44.12
S$233
  Top 0.61: 61.06,21.22 58.96,21.22
S$234
  Top 0.61: 68.86,29.42 71.76,29.42
S$235
  Top 0.61: 67.06,21.32 62.66,21.32
S$236
  Top 0.61: 69.16,21.32 69.16,22.72 67.46,23.82 62.76,23.82
S$237
  Top 0.61: 68.16,21.22 68.16,23.02
S$238
  Top 0.61: 71.76,30.82 67.66,30.82 65.76,28.82
S$239
  Top 0.61: 62.66,28.82 65.86,28.82
S$240
  Top 0.61: 63.16,26.22 65.56,26.22 68.86,29.42
S$241
  Top 0.61: 70.16,31.92 66.36,31.92 65.36,31.12 62.76,31.12 62.76,31.22 | 70.16,31.92 71.66,31.92 | 71.56,33.32 70.16,33.32 70.16,31.92
S$242
  Top 0.61: 78.16,59.62 78.16,61.52 79.86,62.82 84.96,62.82 84.96,63.02
S$243
  Top 0.61: 73.16,59.82 73.16,61.32 | 75.66,60.72 75.66,61.32 73.16,61.32 | 75.66,60.72 75.66,59.92 | 73.16,61.32 70.56,61.32 70.56,60.82 | 70.56,60.82 70.56,59.62 | 73.16,61.32 73.16,63.82 | 70.46,62.72 70.56,62.72 70.56,60.82 | 75.66,62.72 75.66,60.72
S$244
  Top 0.61: 91.56,58.72 91.56,60.32 90.46,61.32 88.56,61.32 86.96,59.72
S$245
  Top 0.61: 76.76,44.12 76.76,45.62 75.46,46.92 73.06,49.22
S$246
  Top 0.61: 70.46,49.32 74.16,45.92 74.16,44.92
S$247
  Top 0.61: 73.06,50.72 73.06,49.22
S$248
  Top 0.61: 84.36,25.52 83.16,25.52
S$249
  Top 0.61: 86.66,25.52 84.46,25.52 84.46,25.42 | 84.46,25.42 83.26,25.42 | 84.46,25.42 86.56,25.42
S$250
  Top 0.61: 75.66,50.72 75.66,49.52 79.26,46.22
S$251
  Top 0.61: 81.86,44.72 81.86,46.12 80.36,46.12 80.36,46.22 | 80.56,44.72 80.56,46.22 80.36,46.22 | 80.36,46.22 79.26,46.22 | 79.26,46.22 78.06,46.22 78.06,44.22 | 79.26,44.42 79.26,46.22
S$252
  Top 0.61: 85.66,44.82 85.66,46.12 86.96,46.12 | 86.96,44.82 86.96,46.12 | 86.96,46.12 86.96,59.72 | 86.96,46.12 86.96,43.92
S$253
  Top 0.61: 84.36,44.42 84.36,46.12 83.06,46.12 83.06,44.42
S$254
  Top 0.61: 83.76,46.22 79.46,50.42
S$255
  Top 1.27: 94.46,35.92 102.56,44.12
S$256
  Top 1.27: 91.56,23.12 89.36,23.12 89.36,25.72 91.46,25.72 91.46,25.52 91.16,25.52 91.16,23.72 90.46,23.72 90.46,24.72
S$257
  Top 1.27: 102.36,59.92 92.66,69.62 92.66,69.52 92.86,69.52
S$258
  Top 1.27: 98.26,69.42 98.66,69.42 98.66,64.92 97.86,64.92 97.86,66.02 97.76,66.02 97.76,68.72 95.56,68.72 95.56,68.32 96.96,68.32 96.96,67.32 97.06,67.32 97.06,66.72 96.36,66.72 96.36,67.42
S$259
  Top 1.27: 95.46,69.42 95.36,69.42 95.36,67.32 95.06,67.32 95.06,68.82
S$260
  Top 1.27: 68.76,62.82 68.56,62.82
S$261
  Top 1.27: 93.26,26.62 90.66,26.62 90.66,26.42
S$262
  Top 1.27: 67.46,13.92 62.66,13.92 62.66,14.02 67.86,13.82 63.86,18.22
S$263
  Top 1.27: 64.76,15.62 65.76,15.62 65.76,14.02
S$264
  Top 0.61: 63.06,62.42 67.16,62.42
S$265
  Top 0.61: 79.56,50.32 78.06,50.32
S$266
  Top 0.61: 78.06,50.52 79.36,50.52
S$267
  Top 0.61: 76.76,45.72 75.46,45.72 | 75.46,45.72 75.46,44.72 | 75.46,45.72 75.46,46.42 75.76,46.42 75.76,46.12
S$268
  Top 0.61: 65.46,31.52 62.86,31.52
S$269
  Top 0.61: 65.96,29.22 62.66,29.22
S$270
  Top 0.61: 62.86,26.52 65.76,26.52
S$271
  Top 0.61: 62.66,23.52 67.86,23.52 67.86,23.42
S$272
  Top 0.61: 62.66,21.12 66.66,21.12
S$273
  Top 0.61: 58.96,20.92 61.06,20.92 61.06,21.42 59.26,21.42
S$274
  Top 0.61: 73.86,15.02 74.06,15.02 74.06,16.12
S$275
  Top 0.61: 75.46,61.72 70.96,61.72
S$276
  Top 0.61: 75.36,62.22 70.86,62.22
S$277
  Top 0.61: 70.86,62.32 67.26,62.32 67.26,62.22
S$278
  Top 0.61: 75.56,62.32 78.86,62.32 78.86,62.22
S$279
  Top 1.016: 93.56,23.52 96.56,20.12 98.86,19.62
S$280
  Top 1.016: 99.76,22.32 95.36,22.32 95.36,22.42
S$281
  Top 1.016: 73.06,84.92 73.06,86.92 74.36,86.92 71.76,83.42 64.96,76.62 64.96,77.72 71.76,77.72
S$282
  Top 1.016: 72.36,84.02 72.46,84.02 72.46,82.52 73.16,82.52 73.16,84.12
S$283
  Top 0.61: 78.16,83.92 78.16,84.62 79.36,84.62 79.36,83.72
S$284
  Top 0.61: 88.06,83.72 86.86,83.72 85.26,85.22
S$285
  Top 0.61: 85.26,85.32 80.66,85.32 80.66,83.72
S$286
  Top 0.61: 81.96,85.22 81.96,83.22
S$287
  Top 0.61: 88.16,82.32 86.26,82.32 | 86.26,82.32 86.06,82.32 84.46,83.82 84.46,82.72 86.26,82.32
S$288
  Top 0.61: 84.86,83.22 84.96,83.22 84.96,82.82
S$289
  Top 0.61: 84.46,83.92 84.46,84.12 83.16,84.12 83.16,83.82
S$290
  Top 0.61: 97.46,81.52 97.36,81.52 97.36,83.72 95.46,83.72 95.46,83.62
S$291
  Top 0.61: 99.16,81.52 100.76,81.52
S$292
  Top 0.61: 97.46,78.42 95.26,78.42 95.26,78.52 97.16,78.52
S$293
  Top 0.61: 95.26,77.32 98.36,77.32 98.36,78.72
S$294
  Top 0.61: 95.26,75.92 98.66,75.92 99.36,76.62 99.36,78.52
S$295
  Top 0.61: 88.06,81.12 87.06,81.12 85.76,79.82 85.76,76.82
S$296
  Top 0.61: 85.76,76.62 84.56,76.12 84.56,76.62
S$297
  Top 0.61: 87.66,79.82 87.66,77.22
S$298
  Top 0.61: 87.36,79.82 87.36,77.22
S$299
  Top 0.61: 87.86,76.02 87.16,76.02 84.56,74.02 83.16,74.02 | 83.16,74.02 79.46,74.02 79.46,76.42 | 83.26,76.12 83.16,76.12 83.16,74.02
S$300
  Top 0.61: 80.66,76.22 80.66,74.32
S$301
  Top 0.61: 81.96,76.12 81.96,74.12
S$302
  Top 1.016: 97.36,71.82 99.86,74.42 101.86,76.52
S$303
  Top 1.016: 100.56,72.32 100.56,74.22 100.06,74.22 100.06,72.32 99.46,72.32 99.46,72.92
S$304
  Top 1.016: 101.16,78.12 101.16,82.52 95.26,88.52
S$305
  Top 1.016: 98.76,86.62 98.76,85.52
S$306
  Top 1.016: 78.66,85.42 78.56,85.42 80.06,86.52 82.06,86.92
S$307
  Top 1.016: 76.86,74.42 76.96,74.42 76.96,71.32 75.76,71.32 75.76,73.92 82.16,71.32
S$308
  Top 0.61: 76.66,14.82 76.76,14.82 76.76,21.42
S$309
  Top 0.61: 80.56,25.52 80.56,27.12 | 80.56,25.52 79.26,25.62 | 79.36,25.52 80.56,25.52
S$310
  Top 0.61: 74.26,26.92 74.26,26.02 74.16,26.02 74.16,14.72
S$311
  Top 0.61: 76.76,25.22 76.76,26.82 | 76.76,25.22 76.76,24.72 | 76.76,24.12 76.76,25.22
S$312
  Top 0.61: 76.76,24.02 74.16,21.42 74.16,24.02
S$313
  Top 0.61: 92.86,12.72 90.96,12.72 88.66,15.02
S$314
  Top 0.61: 88.66,15.12 86.86,15.12 86.86,14.62 88.46,14.62 88.46,14.72 88.76,14.72 88.76,14.52 88.96,14.52
S$315
  Top 0.254: 58.16,79.82 58.16,78.82 58.96,78.82 58.96,78.92 58.86,78.92 58.86,79.12 58.36,79.12 58.36,79.62 58.56,79.62 58.56,79.32 58.66,79.32 58.66,78.92 58.36,78.92
S$316
  Top 0.61: 73.66,86.52 73.86,86.52 73.86,83.32 71.56,83.32 71.56,80.82 71.16,80.82 71.16,81.92 70.86,81.92 70.86,80.72 70.46,80.72 70.46,81.22 70.16,81.22 70.16,79.82 69.76,79.82 69.76,80.62 69.36,80.62 69.36,78.82 69.06,78.82 | 68.16,78.82 69.06,78.82 | 69.06,78.82 69.06,79.62 68.56,79.62 68.56,79.12
S$317
  Top 0.254: 58.06,83.12 58.06,83.32 59.16,84.22
  Top 0.305: 58.06,83.32 58.06,82.92
S$318
  Top 0.254: 58.16,84.12 58.16,83.92 | 58.16,83.42 58.16,83.92 | 58.16,83.92 58.46,83.92 | 58.46,83.92 58.76,83.92 58.76,84.02 58.36,83.82 58.36,83.72 58.46,83.92 | 58.46,83.92 58.46,83.82
S$319
  Top 0.254: 58.26,84.32 58.36,84.32 58.36,84.02 58.86,84.02 58.86,84.12 58.96,84.12 58.96,84.22 58.46,84.22 58.46,84.12
S$320
  Top 0.254: 59.16,78.62 59.16,78.92
S$321
  Top 0.254: 68.16,79.32 68.26,79.32 68.26,78.92
S$322
  Top 0.254: 69.06,80.12 69.06,79.82
S$323
  Top 0.254: 58.36,81.82 59.66,81.82 | 57.96,81.82 57.96,78.22 | 59.46,78.72 58.06,80.12 57.96,80.22 57.96,81.12
  Top 0.305: 59.96,81.82 60.16,81.82 | 58.36,81.82 59.96,81.82 | 58.36,81.82 57.96,81.82 58.06,81.82 58.06,81.42 | 58.06,80.12 58.06,81.42 | 59.96,81.82 60.36,81.82 60.66,81.82 | 58.06,81.42 58.36,81.82
S$324
  Top 0.305: 58.46,82.82 58.06,83.02
S$325
  Top 0.406: 69.86,12.22 67.66,14.62
S$326
  Top 0.406: 58.26,81.62 58.26,81.42 | 58.26,81.42 58.26,79.72 | 58.26,81.42 58.56,81.72
S$327
  Top 0.254: 61.26,82.82 61.66,82.82 61.66,83.22 61.26,83.22 61.26,82.92 61.56,82.92 61.56,83.02 61.46,83.02
  Top 0.305: 61.26,82.82 61.46,82.82
S$328
  Top 0.254: 60.36,81.52 60.06,81.82
S$329
  Top 0.305: 61.26,81.72 61.46,81.72
S$330
  Top 0.254: 60.36,81.72 60.36,81.32 60.66,81.32 60.66,81.72 60.56,81.72 60.56,81.42
S$331
  Top 0.254: 61.26,81.82 61.26,81.32 61.66,81.32 61.66,81.82 61.36,81.82 61.36,81.42 61.56,81.42 61.56,81.62
S$332
  Top 0.3: 58.16,52.42 57.86,52.42 57.86,52.72
S$333
  Top 0.3: 58.16,51.42 57.86,51.42 57.86,51.12
S$334
  Top 0.16: 57.92,52.64 58,52.56 58.08,52.56 58.08,52.64
S$335
  Top 0.16: 58.16,51.36 57.84,50.96
S$336
  Top 0.16: 58.72,52.48 58.72,52.72 58.96,52.72 58.96,52.32 58.8,52.48 58.8,52.64
S$337
  Top 0.16: 58.96,51.52 58.96,51.12 58.72,51.12 58.72,51.36 58.8,51.28 58.8,51.2 58.88,51.12
S$338
  Top 0.813: 63.92,55.84 58.4,55.84
S$339
  Top 0.813: 58.16,58 58.16,56.08
S$340
  Top 0.813: 64.16,48 64.08,48 58.32,48
S$341
  Top 0.813: 58.16,45.52 58.16,47.84
S$342
  Top 0.16: 58.08,54.88 58.16,54.88 | 58.08,54.88 58.16,54.88 | 58.08,54.88 57.84,54.88 57.84,53.04 | 57.84,53.04 57.84,52.64 | 57.84,53.04 58.24,52.64 58.24,52.48 57.84,52.96 | 58.24,54.88 58.4,54.88 58.88,54.88 | 58.24,54.88 58.16,54.88 | 58.88,54.88 58.24,54.88 | 59.2,54.88 59.12,54.88 | 59.28,54.88 59.2,54.88 | 59.28,54.88 59.2,54.88 | 59.28,54.88 58.88,54.88 | 59.28,54.88 59.52,54.88 59.52,52.16 59.84,52.16 59.84,54.88 60.16,54.88 60.16,52.16 60.48,52.16 60.48,54.88 60.8,54.88 60.8,52.16 61.12,52.16 61.12,54.88 61.44,54.88 61.44,52.16 61.76,52.16 61.76,54.88 62.08,54.88 62.08,52.16 62.4,52.16 62.4,54.88 62.72,54.88 62.72,52.16 63.04,52.16 63.04,54.88 63.12,54.88 | 63.12,54.88 63.2,54.88 63.12,54.88 | 63.12,54.88 63.44,54.88 63.52,54.88 63.84,54.88 63.84,51.92 63.84,48.96 63.52,48.96 63.2,48.96 63.04,48.96 63.04,51.68 62.72,51.68 62.72,48.96 62.4,48.96 62.4,51.68 62.08,51.68 62.08,48.96 61.76,48.96 61.76,51.68 61.44,51.68 61.44,48.96 61.12,48.96 61.12,51.68 60.8,51.68 60.8,48.96 60.48,48.96 60.48,51.68 60.16,51.68 60.16,48.96 59.84,48.96 59.84,51.68 59.52,51.68 59.52,48.96 59.04,48.96 | 59.04,48.96 58.96,48.96 | 59.04,48.96 58.88,48.96 58.4,48.96 57.84,48.96 57.84,50.8 | 58.24,51.44 58.24,51.2 57.84,50.8 | 57.84,50.8 57.84,51.28
S$343
  Top 0.254: 111.03,66.2 111.03,66.1 | 111.03,66.2 111.03,65.6 111.73,65.3 111.03,66.2
S$344
  Top 0.254: 111.03,65.5 111.33,65.5 111.33,65.1 111.13,65.1 111.13,65.4
S$345
  Top 1.422: 118.23,73.5 118.13,73.5
S$346
  Top 1.422: 114.23,63.6 119.93,70
S$347
  Top 1.422: 127.83,83.6 118.13,74.1 122.23,76.7 123.03,74.7
S$348
  Top 1.422: 123.73,79.2 123.83,79.2 123.83,73.9 122.83,73.9 122.83,78 122.23,78 122.23,74.1 121.13,74.1 121.13,75.2 120.23,75.2 120.23,74.1
S$349
  Top 1.422: 118.83,68.3 118.83,63.7 117.73,63.7 117.73,67.1 117.13,66.4 117.03,63.5 116.23,63.5 116.23,63.3 116.33,63.3 116.33,64.5 115.73,64.5 115.73,63.2
S$350
  Top 1.422: 115.33,64.3 111.53,64.3 111.53,64.7 115.83,64.7 115.83,64.8
S$351
  Top 0.254: 111.03,82.8 111.03,84.9 | 111.73,82.7 111.33,83.1 | 113.13,82.7 113.43,83 113.73,83 113.73,82.8 113.73,83.1 113.43,83.1
  Top 0.305: 113.13,82.7 112.73,82.7 | 113.13,82.7 113.23,82.7 | 112.73,82.7 111.73,82.7 111.03,82.7 111.03,82.8 111.13,82.8 111.13,83.2 | 113.13,82.7 112.73,82.7 | 113.13,82.7 113.73,82.7 | 113.43,83 113.43,82.8
S$352
  Top 0.254: 111.23,65.8 111.03,65.8 | 111.23,65.8 111.13,66 | 111.23,65.8 111.53,65.4 111.23,65.7 | 111.23,65.8 111.33,65.8 111.23,65.7 | 111.23,65.7 111.23,65.8 | 111.23,65.7 111.03,65.9
S$353
  Top 0.254: 111.13,67.8 111.73,67.8 111.73,68 111.33,68 111.33,68.4 111.53,68.4 111.53,68.1
S$354
  Top 1.27: 119.13,71.5 119.73,71.5 119.73,71.9 113.93,66
S$355
  Top 0.254: 117.33,69 117.33,68.2
S$356
  Top 0.61: 140.83,40.9 144.53,40.9 147.23,43.6 147.23,49.9 147.33,49.9
S$357
  Top 0.61: 152.43,58.2 152.43,63.2 | 152.43,63.2 152.43,63.4 | 152.43,63.2 152.43,68.7
S$358
  Top 0.61: 152.13,61.9 152.13,57.9
S$359
  Top 0.61: 140.73,39.5 145.43,39.5
S$360
  Top 0.61: 145.53,39.5 149.73,43.8
S$361
  Top 0.61: 149.83,49.7 149.83,44
S$362
  Top 0.61: 144.73,43.2 144.73,49.9
S$363
  Top 0.61: 144.63,43.1 143.63,42.1 141.03,42.1
S$364
  Top 0.61: 140.93,38.2 146.13,38.2 152.13,44.2
S$365
  Top 0.61: 152.33,49.7 152.33,44.3
S$366
  Top 0.61: 148.73,18.3 148.73,24.4
S$367
  Top 0.61: 148.73,15.5 153.93,15.5 153.93,15.6
S$368
  Top 0.61: 142.03,36.9 154.63,36.9 154.93,36.9 | 155.43,36.9 154.93,36.9 | 154.93,36.9 154.93,35.3
  Top 1.27: 154.63,36.9 154.83,36.9 154.83,42.2 154.13,42.2 154.13,36.8 153.63,36.8 153.63,40.5 152.83,40.5 152.83,37.1 151.93,37.1 151.93,39.3 151.43,39.3 151.43,37.1 150.43,37.1 150.43,37.8
S$369
  Top 0.61: 141.53,35.7 155.13,35.7
S$370
  Top 0.61: 141.73,29.4 149.63,29.4 149.63,29.3
S$371
  Top 0.61: 141.83,30.6 147.63,30.6 150.13,30.6
  Top 1.27: 142.43,25.6 148.73,32.4 148.73,25.1 147.63,25.1 147.63,30.6
S$372
  Top 0.61: 141.63,31.9 149.83,31.9 149.83,31.7
S$373
  Top 0.61: 141.93,33 149.43,33 149.43,32.9
S$374
  Top 0.61: 141.93,34.3 149.43,34.3 149.43,34.2
S$375
  Top 0.61: 147.73,15.6 147.73,13.9 146.03,12.6
S$376
  Top 0.61: 146.73,15.4 146.73,13.4
S$377
  Top 0.61: 137.43,14.8 137.43,15.9 137.53,15.9 137.53,25.5 | 137.43,26.8 137.43,25.5 137.53,25.5 | 137.53,25.5 138.73,25.5 138.73,26.8
S$378
  Top 0.61: 137.53,16.2 142.13,20.8
S$379
  Top 0.61: 146.73,18.3 146.73,19
S$380
  Top 0.61: 146.73,19.1 144.93,20.8 142.13,20.8
S$381
  Top 0.61: 134.83,14.8 134.93,14.8 134.93,28.1
S$382
  Top 0.61: 140.93,64.8 143.83,64.8 | 143.83,64.8 145.43,64.8 149.83,60.3 | 140.83,63.8 143.83,63.8 143.83,64.8
S$383
  Top 0.61: 149.83,60.4 149.83,58.6
S$384
  Top 0.61: 140.83,62.8 144.63,62.8 147.23,60
S$385
  Top 0.61: 147.13,60.1 147.23,60.1 147.23,58.3
S$386
  Top 0.61: 132.33,14.8 132.33,16.2 134.93,18.8 134.93,17.5
S$387
  Top 0.61: 132.33,26.7 132.33,25.4 131.03,25.4 131.03,25.5 | 131.03,25.5 131.03,26.9 | 131.03,25.5 131.03,22.8 129.83,21.4
S$388
  Top 0.61: 128.43,25.4 127.33,25.4
S$389
  Top 0.61: 138.23,64.8 135.83,64.8 133.63,66.4
S$390
  Top 0.61: 133.53,66.5 133.53,69.7
S$391
  Top 0.61: 128.53,26.8 128.53,25.4
S$392
  Top 0.61: 136.23,26.7 136.13,26.7 136.13,25.3
S$393
  Top 0.61: 136.13,25.5 136.13,25.4 139.93,25.3 139.93,27.6
S$394
  Top 0.61: 124.93,42.1 123.13,42.1 | 123.13,42.1 122.73,42.1 | 122.73,42.1 121.03,42.1 121.03,42 | 124.63,40.9 123.13,40.9 123.13,40.7 | 123.13,40.7 123.13,39.5 124.93,39.5 124.93,39.6 | 123.13,42.1 123.13,40.7 | 122.73,42.1 122.73,39.5 122.33,39.5 | 121.83,39.5 122.33,39.5 | 122.33,39.5 122.33,41.9
S$395
  Top 0.61: 125.13,38.2 121.03,38.2 121.03,38.3
S$396
  Top 0.61: 125.13,36.9 121.33,36.9 121.33,37
S$397
  Top 0.61: 124.53,35.7 123.23,35.7 123.23,34.4 | 123.23,34.4 124.73,34.4 | 117.73,34.4 123.23,34.4
S$398
  Top 0.61: 115.93,33.9 116.83,33.9 117.73,34.4
S$399
  Top 0.61: 122.13,18.1 122.13,16.2
S$400
  Top 0.61: 122.13,16.2 123.93,14.6
S$401
  Top 0.61: 127.33,14.6 123.93,14.6
S$402
  Top 0.61: 120.33,18.5 120.43,18.5 120.43,16.3 118.73,14.6 111.93,14.6 111.93,14.7
S$403
  Top 0.61: 123.53,50.5 123.53,47.8 120.23,44
S$404
  Top 0.61: 114.13,21.1 112.03,21.1
S$405
  Top 0.61: 121.93,29.3 124.83,29.3
S$406
  Top 0.61: 120.13,21.2 115.73,21.2
S$407
  Top 0.61: 122.23,21.2 122.23,22.6 120.53,23.7 115.83,23.7
S$408
  Top 0.61: 121.23,21.1 121.23,22.9
S$409
  Top 0.61: 124.83,30.7 120.73,30.7 118.83,28.7
S$410
  Top 0.61: 115.73,28.7 118.93,28.7
S$411
  Top 0.61: 116.23,26.1 118.63,26.1 121.93,29.3
S$412
  Top 0.61: 123.23,31.8 119.43,31.8 118.43,31 115.83,31 115.83,31.1 | 123.23,31.8 124.73,31.8 | 124.63,33.2 123.23,33.2 123.23,31.8
S$413
  Top 0.61: 131.23,59.5 131.23,61.4 132.93,62.7 138.03,62.7 138.03,62.9
S$414
  Top 0.61: 126.23,59.7 126.23,61.2 | 128.73,60.6 128.73,61.2 126.23,61.2 | 128.73,60.6 128.73,59.8 | 126.23,61.2 123.63,61.2 123.63,60.7 | 123.63,60.7 123.63,59.5 | 126.23,61.2 126.23,63.7 | 123.53,62.6 123.63,62.6 123.63,60.7 | 128.73,62.6 128.73,60.6
S$415
  Top 0.61: 144.63,58.6 144.63,60.2 143.53,61.2 141.63,61.2 140.03,59.6
S$416
  Top 0.61: 129.83,44 129.83,45.5 128.53,46.8 126.13,49.1
S$417
  Top 0.61: 123.53,49.2 127.23,45.8 127.23,44.8
S$418
  Top 0.61: 126.13,50.6 126.13,49.1
S$419
  Top 0.61: 137.43,25.4 136.23,25.4
S$420
  Top 0.61: 139.73,25.4 137.53,25.4 137.53,25.3 | 137.53,25.3 136.33,25.3 | 137.53,25.3 139.63,25.3
S$421
  Top 0.61: 128.73,50.6 128.73,49.4 132.33,46.1
S$422
  Top 0.61: 134.93,44.6 134.93,46 133.43,46 133.43,46.1 | 133.63,44.6 133.63,46.1 133.43,46.1 | 133.43,46.1 132.33,46.1 | 132.33,46.1 131.13,46.1 131.13,44.1 | 132.33,44.3 132.33,46.1
S$423
  Top 0.61: 138.73,44.7 138.73,46 140.03,46 | 140.03,44.7 140.03,46 | 140.03,46 140.03,59.6 | 140.03,46 140.03,43.8
S$424
  Top 0.61: 137.43,44.3 137.43,46 136.13,46 136.13,44.3
S$425
  Top 0.61: 136.83,46.1 132.53,50.3
S$426
  Top 1.27: 147.53,35.8 155.63,44
S$427
  Top 1.27: 144.63,23 142.43,23 142.43,25.6 144.53,25.6 144.53,25.4 144.23,25.4 144.23,23.6 143.53,23.6 143.53,24.6
S$428
  Top 1.27: 155.43,59.8 145.73,69.5 145.73,69.4 145.93,69.4
S$429
  Top 1.27: 151.33,69.3 151.73,69.3 151.73,64.8 150.93,64.8 150.93,65.9 150.83,65.9 150.83,68.6 148.63,68.6 148.63,68.2 150.03,68.2 150.03,67.2 150.13,67.2 150.13,66.6 149.43,66.6 149.43,67.3
S$430
  Top 1.27: 148.53,69.3 148.43,69.3 148.43,67.2 148.13,67.2 148.13,68.7
S$431
  Top 1.27: 121.83,62.7 121.63,62.7
S$432
  Top 1.27: 146.33,26.5 143.73,26.5 143.73,26.3
S$433
  Top 1.27: 120.53,13.8 115.73,13.8 115.73,13.9 120.93,13.7 116.93,18.1
S$434
  Top 1.27: 117.83,15.5 118.83,15.5 118.83,13.9
S$435
  Top 0.61: 116.13,62.3 120.23,62.3
S$436
  Top 0.61: 132.63,50.2 131.13,50.2
S$437
  Top 0.61: 131.13,50.4 132.43,50.4
S$438
  Top 0.61: 129.83,45.6 128.53,45.6 | 128.53,45.6 128.53,44.6 | 128.53,45.6 128.53,46.3 128.83,46.3 128.83,46
S$439
  Top 0.61: 118.53,31.4 115.93,31.4
S$440
  Top 0.61: 119.03,29.1 115.73,29.1
S$441
  Top 0.61: 115.93,26.4 118.83,26.4
S$442
  Top 0.61: 115.73,23.4 120.93,23.4 120.93,23.3
S$443
  Top 0.61: 115.73,21 119.73,21
S$444
  Top 0.61: 112.03,20.8 114.13,20.8 114.13,21.3 112.33,21.3
S$445
  Top 0.61: 126.93,14.9 127.13,14.9 127.13,16
S$446
  Top 0.61: 128.53,61.6 124.03,61.6
S$447
  Top 0.61: 128.43,62.1 123.93,62.1
S$448
  Top 0.61: 123.93,62.2 120.33,62.2 120.33,62.1
S$449
  Top 0.61: 128.63,62.2 131.93,62.2 131.93,62.1
S$450
  Top 1.016: 146.63,23.4 149.63,20 151.93,19.5
S$451
  Top 1.016: 152.83,22.2 148.43,22.2 148.43,22.3
S$452
  Top 1.016: 126.13,84.8 126.13,86.8 127.43,86.8 124.83,83.3 118.03,76.5 118.03,77.6 124.83,77.6
S$453
  Top 1.016: 125.43,83.9 125.53,83.9 125.53,82.4 126.23,82.4 126.23,84
S$454
  Top 0.61: 131.23,83.8 131.23,84.5 132.43,84.5 132.43,83.6
S$455
  Top 0.61: 141.13,83.6 139.93,83.6 138.33,85.1
S$456
  Top 0.61: 138.33,85.2 133.73,85.2 133.73,83.6
S$457
  Top 0.61: 135.03,85.1 135.03,83.1
S$458
  Top 0.61: 141.23,82.2 139.33,82.2 | 139.33,82.2 139.13,82.2 137.53,83.7 137.53,82.6 139.33,82.2
S$459
  Top 0.61: 137.93,83.1 138.03,83.1 138.03,82.7
S$460
  Top 0.61: 137.53,83.8 137.53,84 136.23,84 136.23,83.7
S$461
  Top 0.61: 150.53,81.4 150.43,81.4 150.43,83.6 148.53,83.6 148.53,83.5
S$462
  Top 0.61: 152.23,81.4 153.83,81.4
S$463
  Top 0.61: 150.53,78.3 148.33,78.3 148.33,78.4 150.23,78.4
S$464
  Top 0.61: 148.33,77.2 151.43,77.2 151.43,78.6
S$465
  Top 0.61: 148.33,75.8 151.73,75.8 152.43,76.5 152.43,78.4
S$466
  Top 0.61: 141.13,81 140.13,81 138.83,79.7 138.83,76.7
S$467
  Top 0.61: 138.83,76.5 137.63,76 137.63,76.5
S$468
  Top 0.61: 140.73,79.7 140.73,77.1
S$469
  Top 0.61: 140.43,79.7 140.43,77.1
S$470
  Top 0.61: 140.93,75.9 140.23,75.9 137.63,73.9 136.23,73.9 | 136.23,73.9 132.53,73.9 132.53,76.3 | 136.33,76 136.23,76 136.23,73.9
S$471
  Top 0.61: 133.73,76.1 133.73,74.2
S$472
  Top 0.61: 135.03,76 135.03,74
S$473
  Top 1.016: 150.43,71.7 152.93,74.3 154.93,76.4
S$474
  Top 1.016: 153.63,72.2 153.63,74.1 153.13,74.1 153.13,72.2 152.53,72.2 152.53,72.8
S$475
  Top 1.016: 154.23,78 154.23,82.4 148.33,88.4
S$476
  Top 1.016: 151.83,86.5 151.83,85.4
S$477
  Top 1.016: 131.73,85.3 131.63,85.3 133.13,86.4 135.13,86.8
S$478
  Top 1.016: 129.93,74.3 130.03,74.3 130.03,71.2 128.83,71.2 128.83,73.8 135.23,71.2
S$479
  Top 0.61: 129.73,14.7 129.83,14.7 129.83,21.3
S$480
  Top 0.61: 133.63,25.4 133.63,27 | 133.63,25.4 132.33,25.5 | 132.43,25.4 133.63,25.4
S$481
  Top 0.61: 127.33,26.8 127.33,25.9 127.23,25.9 127.23,14.6
S$482
  Top 0.61: 129.83,25.1 129.83,26.7 | 129.83,25.1 129.83,24.6 | 129.83,24 129.83,25.1
S$483
  Top 0.61: 129.83,23.9 127.23,21.3 127.23,23.9
S$484
  Top 0.61: 145.93,12.6 144.03,12.6 141.73,14.9
S$485
  Top 0.61: 141.73,15 139.93,15 139.93,14.5 141.53,14.5 141.53,14.6 141.83,14.6 141.83,14.4 142.03,14.4
S$486
  Top 0.254: 111.23,79.7 111.23,78.7 112.03,78.7 112.03,78.8 111.93,78.8 111.93,79 111.43,79 111.43,79.5 111.63,79.5 111.63,79.2 111.73,79.2 111.73,78.8 111.43,78.8
S$487
  Top 0.61: 126.73,86.4 126.93,86.4 126.93,83.2 124.63,83.2 124.63,80.7 124.23,80.7 124.23,81.8 123.93,81.8 123.93,80.6 123.53,80.6 123.53,81.1 123.23,81.1 123.23,79.7 122.83,79.7 122.83,80.5 122.43,80.5 122.43,78.7 122.13,78.7 | 121.23,78.7 122.13,78.7 | 122.13,78.7 122.13,79.5 121.63,79.5 121.63,79
S$488
  Top 0.254: 111.13,83 111.13,83.2 112.23,84.1
  Top 0.305: 111.13,83.2 111.13,82.8
S$489
  Top 0.254: 111.23,84 111.23,83.8 | 111.23,83.3 111.23,83.8 | 111.23,83.8 111.53,83.8 | 111.53,83.8 111.83,83.8 111.83,83.9 111.43,83.7 111.43,83.6 111.53,83.8 | 111.53,83.8 111.53,83.7
S$490
  Top 0.254: 111.33,84.2 111.43,84.2 111.43,83.9 111.93,83.9 111.93,84 112.03,84 112.03,84.1 111.53,84.1 111.53,84
S$491
  Top 0.254: 112.23,78.5 112.23,78.8
S$492
  Top 0.254: 121.23,79.2 121.33,79.2 121.33,78.8
S$493
  Top 0.254: 122.13,80 122.13,79.7
S$494
  Top 0.254: 111.43,81.7 112.73,81.7 | 111.03,81.7 111.03,78.1 | 112.53,78.6 111.13,80 111.03,80.1 111.03,81
  Top 0.305: 113.03,81.7 113.23,81.7 | 111.43,81.7 113.03,81.7 | 111.43,81.7 111.03,81.7 111.13,81.7 111.13,81.3 | 111.13,80 111.13,81.3 | 113.03,81.7 113.43,81.7 113.73,81.7 | 111.13,81.3 111.43,81.7
S$495
  Top 0.305: 111.53,82.7 111.13,82.9
S$496
  Top 0.406: 122.93,12.1 120.73,14.5
S$497
  Top 0.406: 111.33,81.5 111.33,81.3 | 111.33,81.3 111.33,79.6 | 111.33,81.3 111.63,81.6
S$498
  Top 0.254: 114.33,82.7 114.73,82.7 114.73,83.1 114.33,83.1 114.33,82.8 114.63,82.8 114.63,82.9 114.53,82.9
  Top 0.305: 114.33,82.7 114.53,82.7
S$499
  Top 0.254: 113.43,81.4 113.13,81.7
S$500
  Top 0.305: 114.33,81.6 114.53,81.6
S$501
  Top 0.254: 113.43,81.6 113.43,81.2 113.73,81.2 113.73,81.6 113.63,81.6 113.63,81.3
S$502
  Top 0.254: 114.33,81.7 114.33,81.2 114.73,81.2 114.73,81.7 114.43,81.7 114.43,81.3 114.63,81.3 114.63,81.5
S$503
  Top 0.3: 111.23,52.3 110.93,52.3 110.93,52.6
S$504
  Top 0.3: 111.23,51.3 110.93,51.3 110.93,51
S$505
  Top 0.16: 110.99,52.52 111.07,52.44 111.15,52.44 111.15,52.52
S$506
  Top 0.16: 111.23,51.24 110.91,50.84
S$507
  Top 0.16: 111.79,52.36 111.79,52.6 112.03,52.6 112.03,52.2 111.87,52.36 111.87,52.52
S$508
  Top 0.16: 112.03,51.4 112.03,51 111.79,51 111.79,51.24 111.87,51.16 111.87,51.08 111.95,51
S$509
  Top 0.813: 116.99,55.72 111.47,55.72
S$510
  Top 0.813: 111.23,57.88 111.23,55.96
S$511
  Top 0.813: 117.23,47.88 117.15,47.88 111.39,47.88
S$512
  Top 0.813: 111.23,45.4 111.23,47.72
S$513
  Top 0.16: 110.91,52.52 110.91,52.92 111.31,52.52 111.31,52.36 110.91,52.84
S$514
  Top 0.3: 5.28,51.5 4.98,51.5 4.98,51.2
S$515
  Top 0.16: 111.31,51.32 111.31,51.08 110.91,50.68 110.91,51.16
S$516
  Top 0.16: 4.96,52.72 4.96,53.12 5.36,52.72 5.36,52.56 4.96,53.04
S$517
  Top 0.16: 5.04,52.72 5.12,52.64 5.2,52.64 5.2,52.72
S$518
  Top 0.14: 116.92,48.83 116.92,54.78
S$519
  Top 0.16: 5.28,51.44 4.96,51.04
S$520
  Top 0.3: 111.24,52.3 110.94,52.3 110.94,52.6
S$521
  Top 0.16: 5.84,52.56 5.84,52.8 6.08,52.8 6.08,52.4 5.92,52.56 5.92,52.72
S$522
  Top 0.16: 6.08,51.6 6.08,51.2 5.84,51.2 5.84,51.44 5.92,51.36 5.92,51.28 6,51.2
S$523
  Top 0.16: 5.2,54.96 5.28,54.96 | 5.2,54.96 5.28,54.96 | 5.2,54.96 4.96,54.96 4.96,53.12 | 4.96,53.12 4.96,52.72 | 4.96,53.12 5.36,52.72 5.36,52.56 4.96,53.04 | 5.36,54.96 5.52,54.96 6,54.96 | 5.36,54.96 5.28,54.96 | 6,54.96 5.36,54.96 | 6.32,54.96 6.24,54.96 | 6.4,54.96 6.32,54.96 | 6.4,54.96 6.32,54.96 | 6.4,54.96 6,54.96 | 6.4,54.96 6.64,54.96 6.64,52.24 6.96,52.24 6.96,54.96 7.28,54.96 7.28,52.24 7.6,52.24 7.6,54.96 7.92,54.96 7.92,52.24 8.24,52.24 8.24,54.96 8.56,54.96 8.56,52.24 8.88,52.24 8.88,54.96 9.2,54.96 9.2,52.24 9.52,52.24 9.52,54.96 9.84,54.96 9.84,52.24 10.16,52.24 10.16,54.96 10.24,54.96 | 10.24,54.96 10.32,54.96 10.24,54.96 | 10.24,54.96 10.56,54.96 10.64,54.96 10.96,54.96 10.96,52 10.96,49.04 10.64,49.04 10.32,49.04 10.16,49.04 10.16,51.76 9.84,51.76 9.84,49.04 9.52,49.04 9.52,51.76 9.2,51.76 9.2,49.04 8.88,49.04 8.88,51.76 8.56,51.76 8.56,49.04 8.24,49.04 8.24,51.76 7.92,51.76 7.92,49.04 7.6,49.04 7.6,51.76 7.28,51.76 7.28,49.04 6.96,49.04 6.96,51.76 6.64,51.76 6.64,49.04 6.16,49.04 | 6.16,49.04 6.08,49.04 | 6.16,49.04 6,49.04 5.52,49.04 4.96,49.04 4.96,50.88 | 5.36,51.52 5.36,51.28 4.96,50.88 | 4.96,50.88 4.96,51.36
S$524
  Top 0.16: 4.96,51.36 4.96,50.88 5.36,51.28 5.36,51.52
S$525
  Top 0.3: 111.24,51.3 110.94,51.3 110.94,51
S$526
  Top 0.16: 111,52.52 111.08,52.44 111.16,52.44 111.16,52.52
S$527
  Top 0.16: 111.24,51.24 110.92,50.84
S$528
  Top 0.16: 111.8,52.36 111.8,52.6 112.04,52.6 112.04,52.2 111.88,52.36 111.88,52.52
S$529
  Top 0.16: 112.04,51.4 112.04,51 111.8,51 111.8,51.24 111.88,51.16 111.88,51.08 111.96,51
S$530
  Top 0.16: 111.16,54.76 111.24,54.76 | 111.16,54.76 111.24,54.76 | 111.16,54.76 110.92,54.76 110.92,52.92 | 110.92,52.92 110.92,52.52 | 110.92,52.92 111.32,52.52 111.32,52.36 110.92,52.84 | 111.32,54.76 111.48,54.76 111.96,54.76 | 111.32,54.76 111.24,54.76 | 111.96,54.76 111.32,54.76 | 112.28,54.76 112.2,54.76 | 112.36,54.76 112.28,54.76 | 112.36,54.76 112.28,54.76 | 112.36,54.76 111.96,54.76 | 112.36,54.76 112.6,54.76 112.6,52.04 112.92,52.04 112.92,54.76 113.24,54.76 113.24,52.04 113.56,52.04 113.56,54.76 113.88,54.76 113.88,52.04 114.2,52.04 114.2,54.76 114.52,54.76 114.52,52.04 114.84,52.04 114.84,54.76 115.16,54.76 115.16,52.04 115.48,52.04 115.48,54.76 115.8,54.76 115.8,52.04 116.12,52.04 116.12,54.76 116.2,54.76 | 116.2,54.76 116.28,54.76 116.2,54.76 | 116.2,54.76 116.52,54.76 116.6,54.76 116.92,54.76 116.92,51.8 116.92,48.84 116.6,48.84 116.28,48.84 116.12,48.84 116.12,51.56 115.8,51.56 115.8,48.84 115.48,48.84 115.48,51.56 115.16,51.56 115.16,48.84 114.84,48.84 114.84,51.56 114.52,51.56 114.52,48.84 114.2,48.84 114.2,51.56 113.88,51.56 113.88,48.84 113.56,48.84 113.56,51.56 113.24,51.56 113.24,48.84 112.92,48.84 112.92,51.56 112.6,51.56 112.6,48.84 112.12,48.84 | 112.12,48.84 112.04,48.84 | 112.12,48.84 111.96,48.84 111.48,48.84 110.92,48.84 110.92,50.68 | 111.32,51.32 111.32,51.08 110.92,50.68 | 110.92,50.68 110.92,51.16
(copper drawn outside any net)
  shapes: Top area x242

## Text on the board
tPlace: UCODE G2iM+ | V0 | UCODE G2iM+ | V0 | UCODE G2iM+ | V0 | Small | Small | Small
bPlace: KEEP | KEEP | OUT | OUT | AREA | AREA | KEEP | OUT | AREA | KEEP | KEEP | OUT | OUT | AREA | AREA